# Altium PCB main.PcbDoc
Units mm, origin at the board's own origin, x right, y up, seen from the top; angles counter-clockwise.
Board outline 152.4 x 101.6 mm, 2 copper layers (Top Layer, Bottom Layer); 3 components, 1 nets, 78 pads, 0 vias.
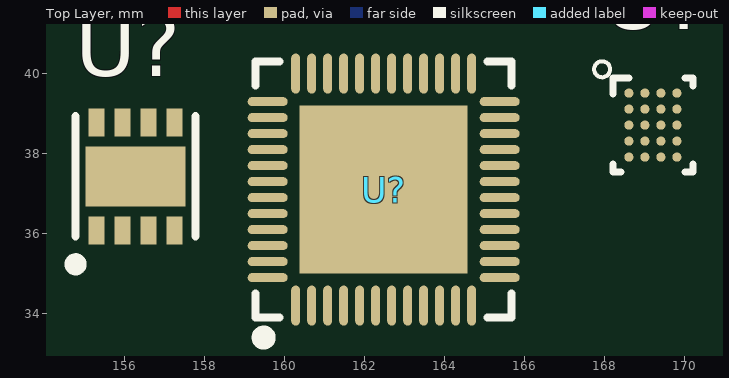
[diagram p0: Top Layer view]
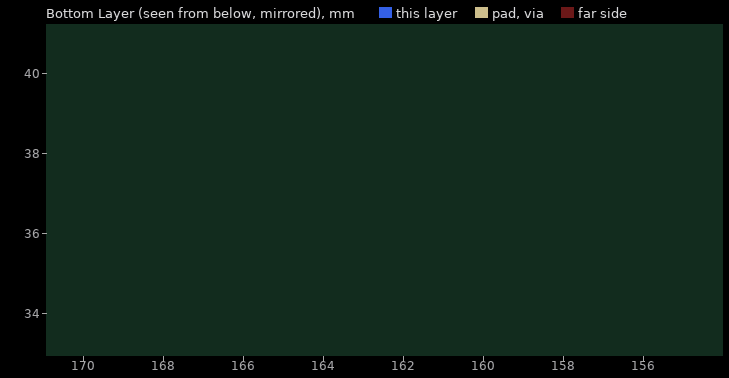
[diagram p1: Bottom Layer view, seen from below]

## Layer stack, top to bottom
Top Solder: solder mask 0.0102, Solder Resist, Dk 3.5
Top Layer: signal copper 0.0356
Dielectric 1: dielectric 0.32, FR-4, Dk 4.8
Bottom Layer: signal copper 0.0356
Bottom Solder: solder mask 0.0102, Solder Resist, Dk 3.5

## Board outline
25.4,25.4 177.8,25.4 177.8,127 25.4,127

## Design rules (kind name [scope] priority, off if disabled: settings)
Clearance [All] p1: gap=0.254 ignorepadtopadclearanceinfootprint=FALSE except(0: Arc-Hole Track-Hole SMDPad-Hole THPad-Hole Via-Hole Fill-Hole Poly-Hole Region-Hole Text-Hole)
PolygonConnect [All] p1: connectstyle=Relief reliefconductorwidth=0.254 reliefentries=4 polygonreliefangle="90 Angle" airgapwidth=0.254
RoomDefinition main [InComponentClass('main')] p1: confinementstyle=ConfineIn formatcopy=TRUE lockcomponents=FALSE outline 154.253,32.535 170.509,32.535 170.509,42.949 154.253,42.949
RoutingVias [All] p1: holewidth=0.711 width=1.27 viastyle="Through Hole" minholewidth=0.711 minwidth=1.27 maxholewidth=0.711 maxwidth=1.27
SolderMaskExpansion [All] p1: expansion=0.102
Width [All] p1: maxlimit=0.254 minlimit=0.254 preferedwidth=0.254
30 further rules are at their usual default settings.

## Classes and differential pairs
component class main: U?

## Components (designator, comment, footprint, x,y, rotation, side; value= is the part's Value field where it differs from the comment)
U? "TPS63024YFFR" YFF0020AJAF 169.199,38.697 r0 top value=Value
U? "TP410x" DFN-8_EP_3x3mm 156.266,37.418 r0 top
U? "ESP32-D0WDQ6" QFN-48_6x6x04P 162.467,37.086 r0 top

## Footprints (in the part's own frame and the unit in brackets; to place one, negate y for a bottom-side part, rotate by r counter-clockwise, add the part's x,y. Pads: shape width x height; smd on the part's side, far side on the other; paste and mask are expansions set on the pad)
DFN-8_EP_3x3mm [mm]
  rect 2.5x1.5 smd mask+0.051: 0(0,0)
  rect 0.4x0.7 smd mask+0.051: 1(-0.975,-1.35) 2(-0.325,-1.35) 3(0.325,-1.35) 4(0.975,-1.35) 5(0.975,1.35) 6(0.325,1.35) 7(-0.325,1.35) 8(-0.975,1.35)
  silkscreen extent -1.63,-2.33 1.5,1.5, body extent -1.5,-1.5 1.5,1.5, height 0.25
QFN-48_6x6x04P [mm]
  rect 4.2x4.2 smd mask+0.051: 0(0,0)
  oval 0.22x1 smd mask+0.051: 1(-2.2,-2.9) 2(-1.8,-2.9) 3(-1.4,-2.9) 4(-1,-2.9) 5(-0.6,-2.9) 6(-0.2,-2.9) 7(0.2,-2.9) 8(0.6,-2.9) 9(1,-2.9) 10(1.4,-2.9) 11(1.8,-2.9) 12(2.2,-2.9) 25(2.2,2.9) 26(1.8,2.9) 27(1.4,2.9) 28(1,2.9) 29(0.6,2.9) 30(0.2,2.9) 31(-0.2,2.9) 32(-0.6,2.9) 33(-1,2.9) 34(-1.4,2.9) 35(-1.8,2.9) 36(-2.2,2.9)
  oval 1x0.22 smd mask+0.051: 13(2.9,-2.2) 14(2.9,-1.8) 15(2.9,-1.4) 16(2.9,-1) 17(2.9,-0.6) 18(2.9,-0.2) 19(2.9,0.2) 20(2.9,0.6) 21(2.9,1) 22(2.9,1.4) 23(2.9,1.8) 24(2.9,2.2) 37(-2.9,2.2) 38(-2.9,1.8) 39(-2.9,1.4) 40(-2.9,1) 41(-2.9,0.6) 42(-2.9,0.2) 43(-2.9,-0.2) 44(-2.9,-0.6) 45(-2.9,-1) 46(-2.9,-1.4) 47(-2.9,-1.8) 48(-2.9,-2.2)
  silkscreen extent -3.2,-3.85 3.2,3.2, body extent -3,-3 3,3, height 0.9
YFF0020AJAF [mm]
  round 0.23 smd paste-0.102 mask+0.038: A1(-0.6,0.8) A2(-0.2,0.8) A3(0.2,0.8) A4(0.6,0.8) B1(-0.6,0.4) B2(-0.2,0.4) B3(0.2,0.4) B4(0.6,0.4) C1(-0.6,0) C2(-0.2,0) C3(0.2,0) C4(0.6,0) D1(-0.6,-0.4) D2(-0.2,-0.4) D3(0.2,-0.4) D4(0.6,-0.4) E1(-0.6,-0.8) E2(-0.2,-0.8) E3(0.2,-0.8) E4(0.6,-0.8)
  silkscreen extent -1.47,-1.17 1,1.6, body extent -0.89,-1.02 0.89,1.02, height 0.25

## Part data
U?: "No Description Available", Alternate_PartNumber=TPS63024YFFT, Manufacturer="Texas Instruments", CompType=IC, Copyright="Copyright (C) 2018 Accelerated Designs. All rights reserved", MountType=SMT, PackageReference=YFF0020AJAF, PartNumber=TPS63024YFFR, PIN_COUNT=20, RefDes=RefDes, RoHS=Y, Type=DEV

## Nets (pads, with @x,y where several pads share a name; then routed paths per layer and width w, separated by ;. In a path a pad name is that pad's centre, name@x,y a point inside that pad or via, vN(x,y) a via of type N, cw(c..) or ccw(c..) an arc to the next point about the centre after c; other vN are vias at no path point)
VDDA: U?.1@160.267,34.186
pads on no net: U?.0 U?.1@155.291,36.068 U?.2 U?.3 U?.4 U?.5 U?.6 U?.7 U?.8 U?.9 U?.10 U?.11 U?.12 U?.13 U?.14 U?.15 U?.16 U?.17 U?.18 U?.19 U?.20 U?.21 U?.22 U?.23 U?.24 U?.25 U?.26 U?.27 U?.28 U?.29 U?.30 U?.31 U?.32 U?.33 U?.34 U?.35 U?.36 U?.37 U?.38 U?.39 U?.40 U?.41 U?.42 U?.43 U?.44 U?.45 U?.46 U?.47 U?.48 U?.A1 U?.A2 U?.A3 U?.A4 U?.B1 U?.B2 U?.B3 U?.B4 U?.C1 U?.C2 U?.C3 U?.C4 U?.D1 U?.D2 U?.D3 U?.D4 U?.E1 U?.E2 U?.E3 U?.E4